# Altium PCB daughterboard.PcbDoc
Units mm, origin at the board's own origin, x right, y up, seen from the top; angles counter-clockwise.
Board outline 54 x 42 mm, 2 copper layers (Top Layer, Bottom Layer); 40 components, 33 nets, 170 pads, 19 vias.
Unrouted connection lines stored in the file: 13.
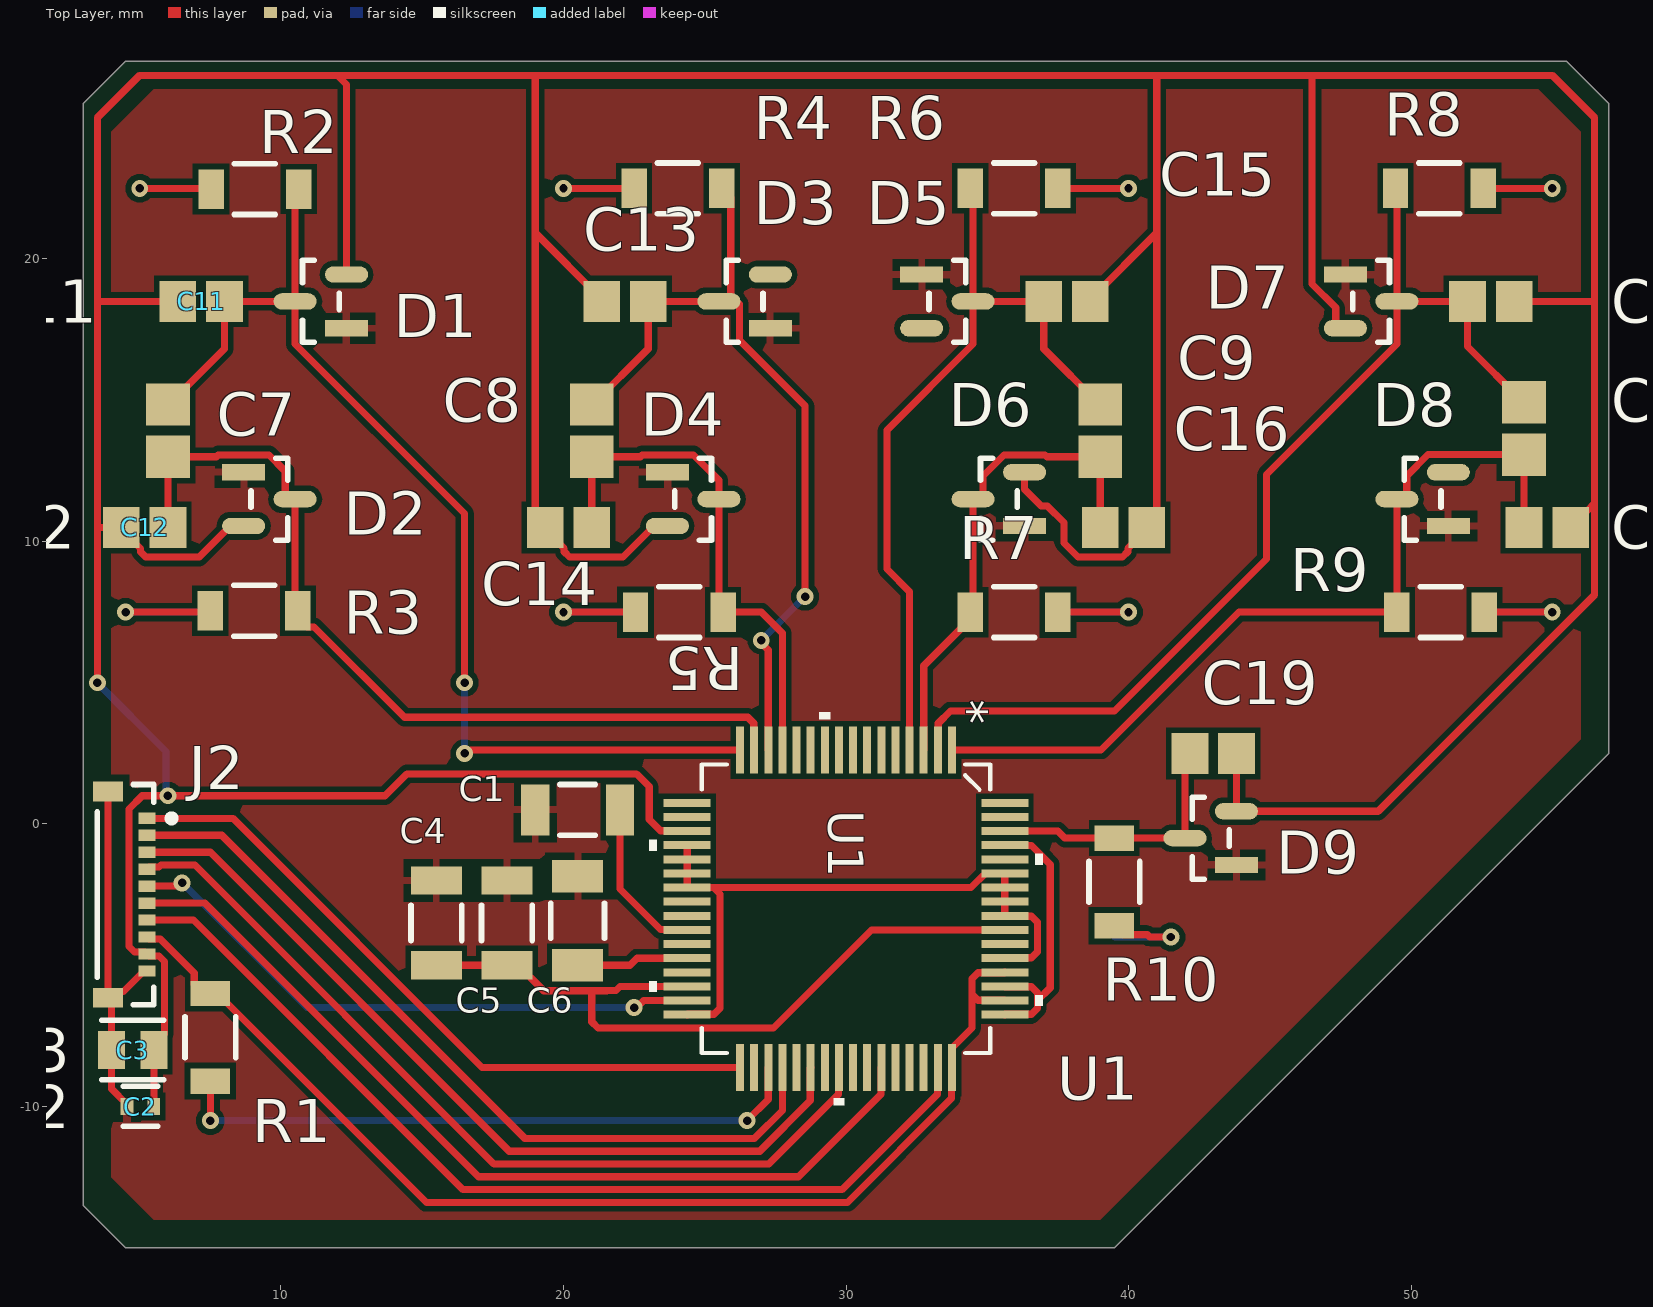
[diagram p0: Top Layer view]
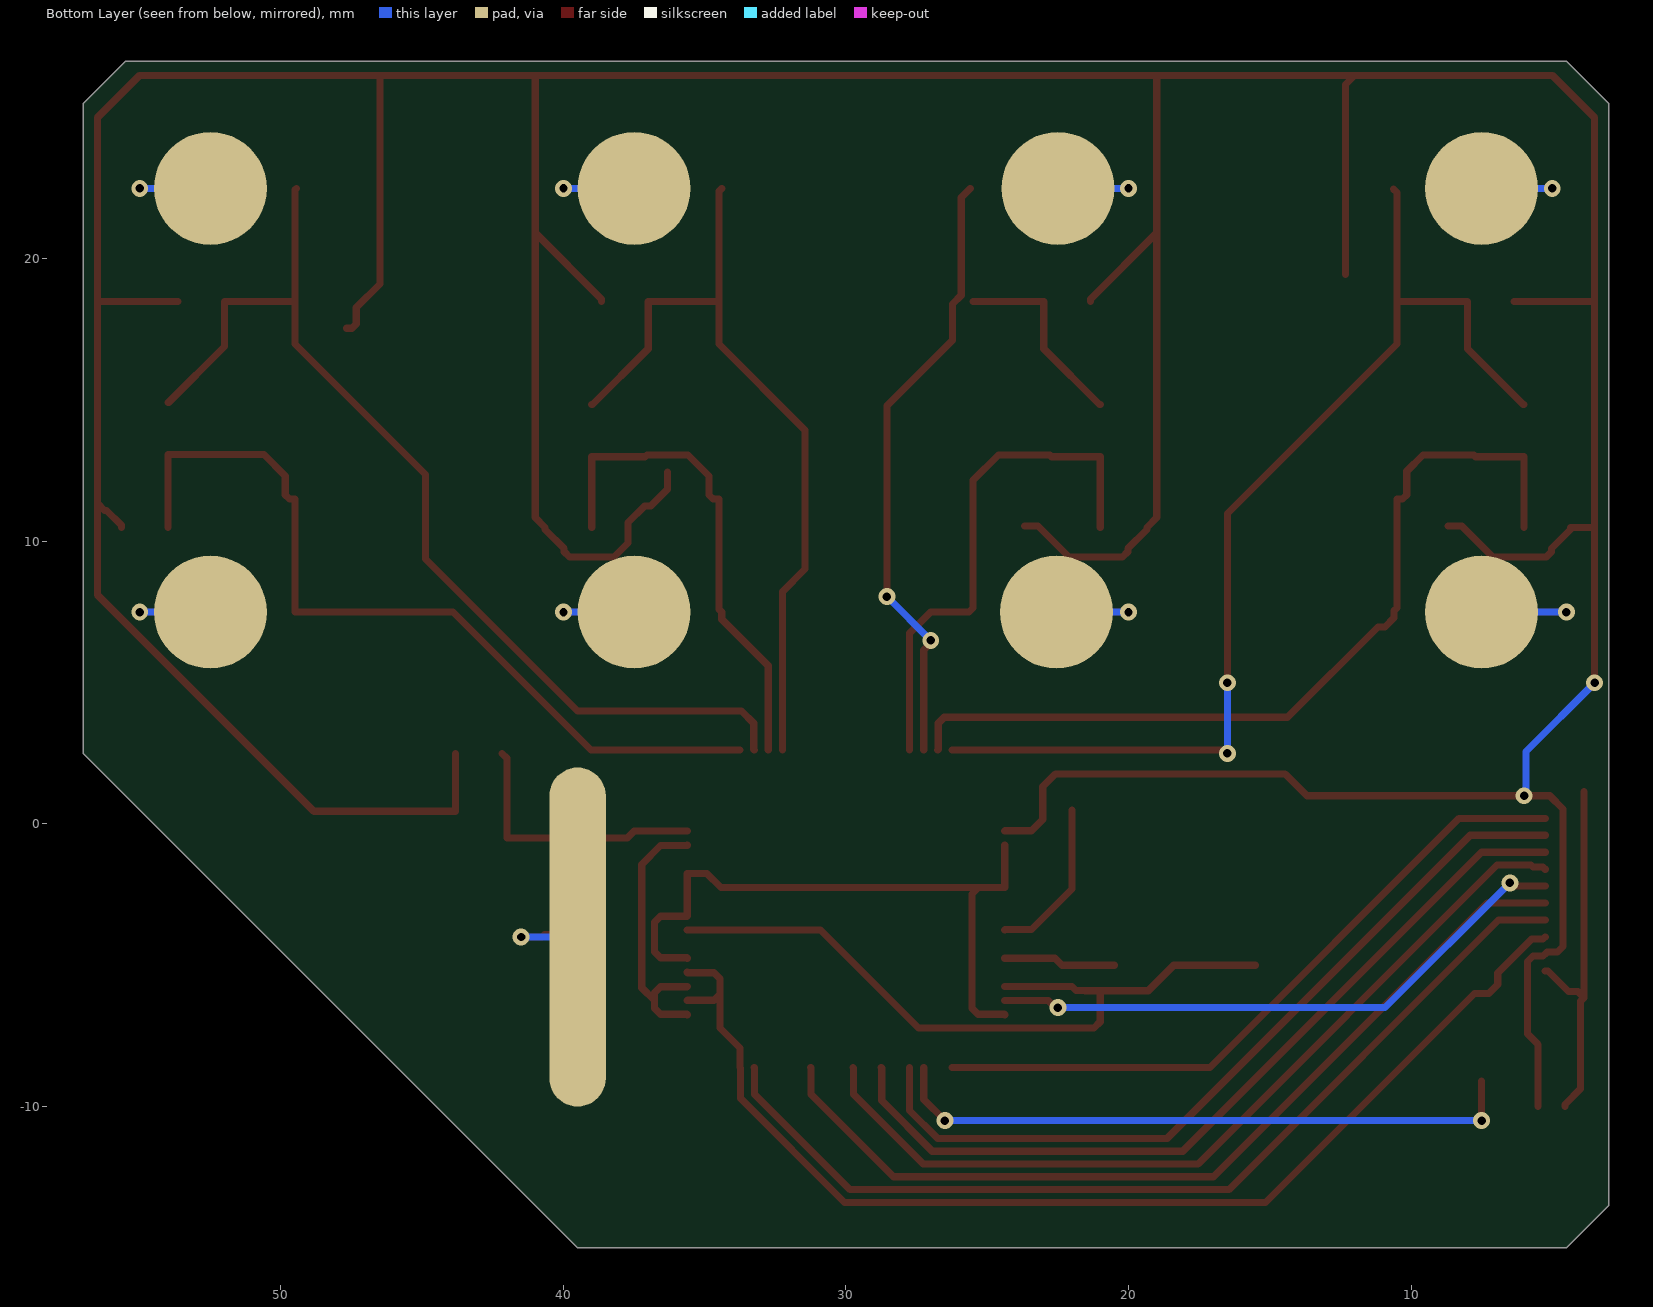
[diagram p1: Bottom Layer view, seen from below]
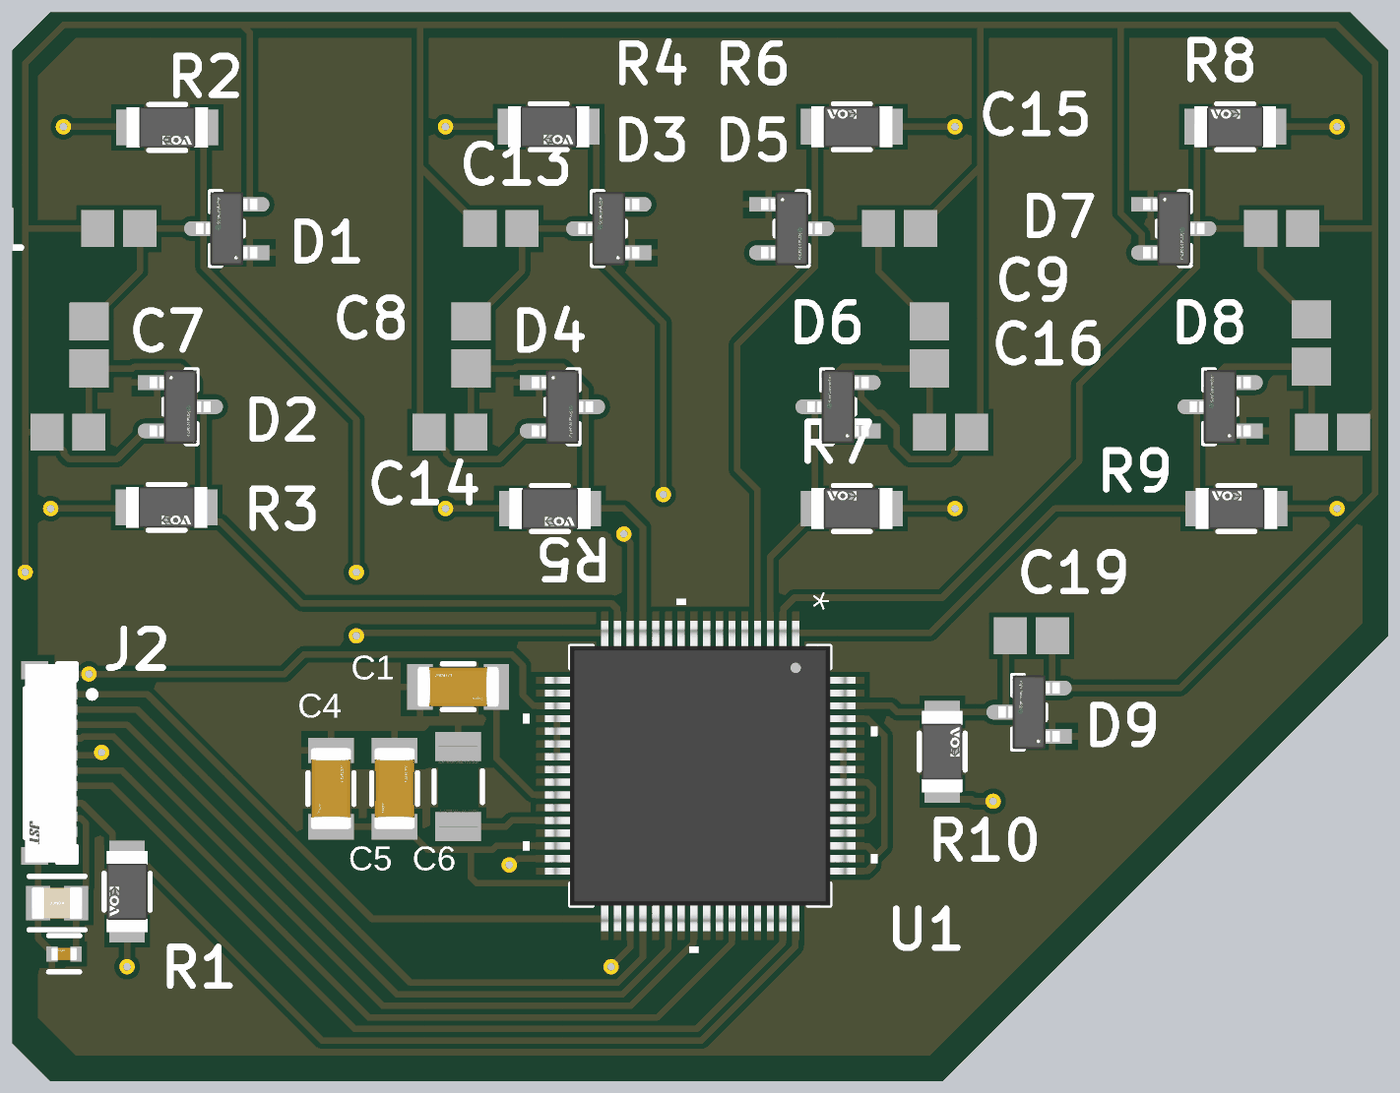
[diagram p2: 3D render of the assembled board from above, using the file's embedded part models]

## Layer stack, top to bottom
Top Solder: solder mask 0.0102, Solder Resist, Dk 3.5
Top Layer: signal copper 0.0356
Dielectric 1: dielectric 0.32, FR-4, Dk 4.8
Bottom Layer: signal copper 0.0356
Bottom Solder: solder mask 0.0102, Solder Resist, Dk 3.5

## Board outline
4.5,-15 3,-13.5 3,25.5 4.5,27 55.5,27 57,25.5 57,2.5 39.5,-15

## Design rules (kind name [scope] priority, off if disabled: settings)
Clearance [All] p1: gap=0.2 ignorepadtopadclearanceinfootprint=FALSE
PolygonConnect [All] p1: connectstyle=Relief reliefconductorwidth=0.254 reliefentries=4 polygonreliefangle="90 Angle" airgapwidth=0.254
RoutingVias [All] p1: holewidth=0.711 width=1.27 viastyle="Through Hole" minholewidth=0.711 minwidth=1.27 maxholewidth=0.711 maxwidth=1.27
SolderMaskExpansion [All] p1: expansion=0 istentingtop=FALSE
Width [All] p1: maxlimit=0.254 minlimit=0.254 preferedwidth=0.254
30 further rules are at their usual default settings.

## Classes and differential pairs
component class U_PROT: C7 C8 C9 C10 C11 C12 C13 C14 C15 C16 C17 C18 C19 D1 D2 D3 D4 D5 D6 D7 D8 D9 R2 R3 R4 R5 R6 R7 R8 R9 R10
component class daughterboard: C1 C2 C3 C4 C5 C6 J2 R1 U1

## Components (designator, comment, footprint, x,y, rotation, side; value= is the part's Value field where it differs from the comment)
C1 "1u" FP-CC1206-1_25-MFG 20.5,0.5 r180 top value="1 uF"
C2 "10 u" FP-ZRB15X-0_22-MFG 5.025,-10 r180 top
C3 "10n" FP-C0805C103K8RACAUTO-MFG 4.75,-8 r180 top
C4 "1u" FP-CC1206-1_25-MFG 15.5,-3.5 r90 top value="1 uF"
C5 "1u" FP-CC1206-1_25-MFG 18,-3.5 r90 top value="1 uF"
C6 "22u" FP-GCJ31C-0_3-MFG 20.5,-3.425 r90 top
C7 "4.7nF" CAPC2013X145X48ML20T23 6,13.925 r90 top
C8 "4.7nF" CAPC2013X145X48ML20T23 21,13.925 r90 top
C9 "4.7nF" CAPC2013X145X48ML20T23 39,13.925 r90 top
C10 "4.7nF" CAPC2013X145X48ML20T23 54,14 r90 top
C11 "470pF" CAPC2013X145X48NL20T23 7.175,18.5 r0 top
C12 "470pF" CAPC2013X145X48NL20T23 5.175,10.5 r0 top
C13 "470pF" CAPC2013X145X48NL20T23 22.175,18.5 r0 top
C14 "470pF" CAPC2013X145X48NL20T23 20.175,10.5 r0 top
C15 "470pF" CAPC2013X145X48NL20T23 37.825,18.5 r180 top
C16 "470pF" CAPC2013X145X48NL20T23 39.825,10.5 r180 top
C17 "470pF" CAPC2013X145X48NL20T23 52.825,18.5 r180 top
C18 "470pF" CAPC2013X145X48NL20T23 54.825,10.5 r180 top
C19 "470pF" CAPC2013X145X48NL20T23 43,2.5 r180 top
D1 "AV99LT1G" FP-318-08-IPC_B 11.41,18.5 r180 top
D2 "AV99LT1G" FP-318-08-IPC_B 9.59,11.5 r0 top
D3 "AV99LT1G" FP-318-08-IPC_B 26.41,18.5 r180 top
D4 "AV99LT1G" FP-318-08-IPC_B 24.59,11.5 r0 top
D5 "AV99LT1G" FP-318-08-IPC_B 33.59,18.5 r0 top
D6 "AV99LT1G" FP-318-08-IPC_B 35.41,11.5 r180 top
D7 "AV99LT1G" FP-318-08-IPC_B 48.59,18.5 r0 top
D8 "AV99LT1G" FP-318-08-IPC_B 50.41,11.5 r180 top
D9 "AV99LT1G" FP-318-08-IPC_B 42.91,-0.5 r180 top
J2 "SM10B-XSRS-ETB (LF)(SN)" FP-SM10B-XSRS-ETB_LF_SN-MFG 4.5,-2.5 r270 top
R1 "10k - RN73R2BTTD1001F25" FP-RN73R2B-MFG 7.5,-7.55 r270 top
R2 "10k" FP-RN73R2B-MFG 9.075,22.475 r0 top
R3 "10k - RN73R2BTTD1001F25" FP-RN73R2B-MFG 9.05,7.55 r0 top
R4 "10k - RN73R2BTTD1001F25" FP-RN73R2B-MFG 24.05,22.5 r0 top
R5 "10k - RN73R2BTTD1001F25" FP-RN73R2B-MFG 24.1,7.5 r0 top
R6 "10k - RN73R2BTTD1001F25" FP-RN73R2B-MFG 35.95,22.5 r180 top
R7 "10k - RN73R2BTTD1001F25" FP-RN73R2B-MFG 35.95,7.5 r180 top
R8 "10k - RN73R2BTTD1001F25" FP-RN73R2B-MFG 51,22.5 r180 top
R9 "10k - RN73R2BTTD1001F25" FP-RN73R2B-MFG 51.05,7.5 r180 top
R10 "10k - RN73R2BTTD1001F25" FP-RN73R2B-MFG 39.5,-2.05 r90 top
U1 "ADS1298IPAG" PAG64 30,-3 r270 top

## Footprints (in the part's own frame and the unit in brackets; to place one, negate y for a bottom-side part, rotate by r counter-clockwise, add the part's x,y. Pads: shape width x height; smd on the part's side, far side on the other; paste and mask are expansions set on the pad)
CAPC2013X145X48ML20T23 [mm] "Chip Capacitor, 2-Leads, Body 2.00x1.25mm, IPC Low Density"
  rect 1.5x1.55 smd: 1(-0.925,0) 2(0.925,0)
  body extent -1.1,-0.72 1.1,0.72, height 1.45
CAPC2013X145X48NL20T23 [mm] "Chip Capacitor, 2-Leads, Body 2.00x1.25mm, IPC Medium Density"
  rect 1.3x1.45 smd: 1(-0.825,0) 2(0.825,0)
  body extent -1.1,-0.72 1.1,0.72, height 1.45
FP-318-08-IPC_B [mm]
  rect 1.524x0.578 smd paste+0 mask+0: 1(-0.91,0.95)
  rrect100% 1.524x0.578 smd paste+0 mask+0: 2(-0.91,-0.95) 3(0.91,0)
  silkscreen extent -0.65,-1.45 0.65,1.45, body extent -1.92,-1.7 1.92,1.7, height 0.25
FP-C0805C103K8RACAUTO-MFG [mm]
  rect 0.95x1.35 smd paste+0 mask+0: 1(-0.75,0) 2(0.75,0)
  silkscreen extent -1.1,-1.05 1.1,1.05, body extent -1.4,-0.85 1.4,0.85, height 0.25
FP-CC1206-1_25-MFG [mm]
  rect 1x1.8 smd paste+0 mask+0: 1(-1.5,0) 2(1.5,0)
  silkscreen extent -0.63,-0.9 0.63,0.9, body extent -2.2,-1.25 2.2,1.25, height 0.25
FP-GCJ31C-0_3-MFG [mm]
  rect 1.15x1.8 smd paste+0 mask+0: 1(-1.575,0) 2(1.575,0)
  silkscreen extent -0.63,-0.95 0.63,0.95, body extent -2.25,-1.05 2.25,1.05, height 0.25
FP-RN73R2B-MFG [mm]
  rect 0.9x1.4 smd paste+0 mask+0: 1(-1.55,0) 2(1.55,0)
  silkscreen extent -0.72,-0.9 0.72,0.9, body extent -2.1,-1 2.1,1, height 0.25
FP-SM10B-XSRS-ETB_LF_SN-MFG [mm]
  rect 0.4x0.6 smd paste+0 mask+0: 1(-2.7,0.75) 2(-2.1,0.75) 3(-1.5,0.75) 4(-0.9,0.75) 5(-0.3,0.75) 6(0.3,0.75) 7(0.9,0.75) 8(1.5,0.75) 9(2.1,0.75) 10(2.7,0.75)
  rect 0.7x1.05 smd paste+0 mask+0: 11(-3.65,-0.625) 12(3.65,-0.625)
  silkscreen extent -3.9,-1 3.9,1.75, body extent -4.1,-1.25 4.1,1.15, height 0.25
FP-ZRB15X-0_22-MFG [mm]
  rect 0.45x0.6 smd paste+0 mask+0: 1(-0.475,0) 2(0.475,0)
  silkscreen extent -0.62,-0.72 0.61,0.7, body extent -0.8,-0.45 0.8,0.45, height 0.25
PAG64 [mil]
  rect 65.5x11 smd paste-32.75 mask-33: 1(-221.25,147.64) 2(-221.25,127.95) 3(-221.25,108.27) 4(-221.25,88.58) 5(-221.25,68.9) 6(-221.25,49.21) 7(-221.25,29.53) 8(-221.25,9.84) 9(-221.25,-9.84) 10(-221.25,-29.53) 11(-221.25,-49.21) 12(-221.25,-68.9) 13(-221.25,-88.58) 14(-221.25,-108.27) 15(-221.25,-127.95) 16(-221.25,-147.64) 33(221.25,-147.64) 34(221.25,-127.95) 35(221.25,-108.27) 36(221.25,-88.58) 37(221.25,-68.9) 38(221.25,-49.21) 39(221.25,-29.53) 40(221.25,-9.84) 41(221.25,9.84) 42(221.25,29.53) 43(221.25,49.21) 44(221.25,68.9) 45(221.25,88.58) 46(221.25,108.27) 47(221.25,127.95) 48(221.25,147.64)
  rect 11x65.5 smd paste-32.75 mask-33: 17(-147.64,-221.25) 18(-127.95,-221.25) 19(-108.27,-221.25) 20(-88.58,-221.25) 21(-68.9,-221.25) 22(-49.21,-221.25) 23(-29.53,-221.25) 24(-9.84,-221.25) 25(9.84,-221.25) 26(29.53,-221.25) 27(49.21,-221.25) 28(68.9,-221.25) 29(88.58,-221.25) 30(108.27,-221.25) 31(127.95,-221.25) 32(147.64,-221.25) 49(147.64,221.25) 50(127.95,221.25) 51(108.27,221.25) 52(88.58,221.25) 53(68.9,221.25) 54(49.21,221.25) 55(29.53,221.25) 56(9.84,221.25) 57(-9.84,221.25) 58(-29.53,221.25) 59(-49.21,221.25) 60(-68.9,221.25) 61(-88.58,221.25) 62(-108.27,221.25) 63(-127.95,221.25) 64(-147.64,221.25)
  silkscreen extent -274,-274 274,274, body extent -240,-240 240,240, height 47

## Part data
C1 C4 C5: library part CMP-03422-001151-1, "CC1206 1 uF X7R 10.00%16 V", Capacitance="1 uF", Manufacturer=Yageo, Manufacturer Part Number=CC1206KFX7R7BB105, Package=CC1206-1.25, Temperature="-55°C to +125°C", Temperature Characteristic=X7R, Temperature Coefficient=15%, Temperature Range High=+125°C, Temperature Range Low=-55°C, Tolerance=0.1, Voltage Rating="16 V", Automotive=No, Automotive Grade=NA, Category=Cap, ComponentLink2Description=Datasheet, ComponentLink2URL=http://www.yageo.com/documents/recent/UPY-NP0X7R_HV_1KV-to-3KV_11.pdf, Device Class L1="Passive Components", Device Class L2=Capacitors, Device Class L3="Ceramic Capacitors", Footprint Url=http://www.yageo.com/exep/pages/download/literatures/UPY-C_GEN_24.pdf, Height=1.45mm, Lead Free=Yes, Material=Ceramic, Mouser Description="Multilayer Ceramic Capacitors MLCC - SMD/SMT 1.0uF 16V X7R 10%", Octopart=https://octopart.com/cc1206kfx7r7bb105-yageo-22250947, RoHS=TRUE
C2: library part CMP-06035-063245-1, "Multilayer Ceramic Capacitors on Interposer Board for General Purpose 10μF ±20% 4VDC X6S  SMD  0402"
C3: library part CMP-00212-126448506-1, "C0805C103K8RACAUTO Cap, 0.01UF, 10V, Mlcc, 0805 Rohs Compliant: Yes", Capacitance=10nF, Case/Package=0805, Dielectric=X7R, Max Operating Temperature=125°C, Min Operating Temperature=-55°C, Tolerance=10%, Voltage Rating=10V, Height=880µm, Material=Ceramic, NexarPartId=126448506, RoHS=Compliant, Voltage Rating (DC)=10V
C6: library part CMP-06035-003359-1, "Cap Ceramic 22uF 10V X7R 20% Pad SMD 1206 Soft Termination  +125°C Automotive T/R"
C7 C8 C9 C10: library part CMP-2007-01915-1, Manufacturer=Vitramon, Part Number=VJ0805Y472KXBMC
C11 C12 C13 C14 C15 C16 C17 C18 C19: library part CMP-2007-03106-1, Manufacturer=Vitramon, Part Number=VJ0805A471JXBMC
D1 D2 D3 D4 D5 D6 D7 D8 D9: library part CMP-07163-000036-1, "DIODE ARRAY 100V 215MA SOT23-3", Capacitance=1.5pF, Case/Package=SOT-23, Current Rating=200mA, Forward Current=150mA, Forward Voltage=1.25V, Max Forward Surge Current (Ifsm)=500mA, Max Operating Temperature=150°C, Max Repetitive Reverse Voltage (Vrrm)=70V, Min Operating Temperature=-65°C, Peak Non-Repetitive Surge Current=2A, Peak Reverse Current=2.5uA, Height=0.94mm, Lead Free="Lead Free", Length=2.9mm, Mount="Surface Mount", Number of Pins=3, Packaging="Tape and Reel", REACH SVHC="No SVHC", Reverse Recovery Time=6ns, Voltage Rating (DC)=70V, Width=1.3mm
J2: library part CMP-17439-000651-1, "CONN HEADER SMD R/A 10POS 0.6MM", Current Rating=200mA, Flammability Rating="UL94 V-0", Insulation Color=Natural, Max Operating Temperature=85°C, Min Operating Temperature=-25°C, Voltage Rating=30V, Connector Type=Header, Contact Finish - Mating=TIN, Contact Material="Copper Alloy", Contact Shape=Rectangular, Contact Type="Outer Shroud Contact", Fastening Type=Friction, Insulation Material=Nylon, Mount="Surface Mount", Number of Contacts=10, Number of Rows=1, Orientation=Straight, Packaging="Cut Tape", Pitch=0.6mm, Series=XSR, Termination=Solder
R1 R2 R3 R4 R5 R6 R7 R8 R9 R10: library part CMP-04015-029161-1, "1kΩ ±1% 0.25W, 1/4W Chip Resistor 1206 (3216 Metric) Moisture Resistant Thin Film"
U1: "8-Channel 24-bit ADC With Integrated ECG Front End 64-TQFP -40 to 85", Manufacturer_Name="Texas Instruments", Copyright="Copyright (C) 2026 Ultra Librarian. All rights reserved.", Manufacturer_Part_Number=ADS1298IPAG, RefDes=RefDes, Type=Type

## Free pads (board coordinates)
  oval 2x12 smd far side: 2(39.5,-4)
  round 4 smd far side: ""(7.5,7.5) ""(7.5,22.5) ""(22.5,22.5) ""(22.55,7.5) ""(37.5,22.5) ""(37.5,7.5) ""(52.5,7.5) ""(52.5,22.5)

## Via types
v1: diameter 0.6, hole 0.3, Top Layer to Bottom Layer, 19 vias

## Nets (pads, with @x,y where several pads share a name; then routed paths per layer and width w, separated by ;. In a path a pad name is that pad's centre, name@x,y a point inside that pad or via, vN(x,y) a via of type N, cw(c..) or ccw(c..) an arc to the next point about the centre after c; other vN are vias at no path point)
CH1_N: pad.@7.5,7.5 R3.1 | length 6
  Top Layer w0.254: v1(4.5,7.5) 7.45,7.5 R3.1
  Bottom Layer w0.254: v1(4.5,7.5) pad.@7.5,7.5
CH1_P: pad.@7.5,22.5 R2.1 | length 5
  Top Layer w0.254: v1(5,22.5) 7.5,22.5 R2.1
  Bottom Layer w0.254: v1(5,22.5) pad.@7.5,22.5
CH2_N: pad.@22.55,7.5 R5.1 | length 5.1
  Top Layer w0.254: v1(20,7.5) R5.1
  Bottom Layer w0.254: v1(20,7.5) pad.@22.55,7.5
CH2_P: pad.@22.5,22.5 R4.1 | length 5
  Top Layer w0.254: v1(20,22.5) R4.1
  Bottom Layer w0.254: v1(20,22.5) pad.@22.5,22.5
CH3_N: pad.@37.5,7.5 R7.1 | length 5
  Top Layer w0.254: R7.1 v1(40,7.5)
  Bottom Layer w0.254: pad.@37.5,7.5 v1(40,7.5)
CH3_P: pad.@37.5,22.5 R6.1 | length 5
  Top Layer w0.254: R6.1 v1(40,22.5)
  Bottom Layer w0.254: pad.@37.5,22.5 v1(40,22.5)
CH4_N: pad.@52.5,7.5 R9.1 | length 4.9
  Top Layer w0.254: R9.1 v1(55,7.5)
  Bottom Layer w0.254: pad.@52.5,7.5 v1(55,7.5)
CH4_P: pad.@52.5,22.5 R8.1 | length 5
  Top Layer w0.254: R8.1 v1(55,22.5)
  Bottom Layer w0.254: pad.@52.5,22.5 v1(55,22.5)
DB_AGND: C1.2 C2.2 C3.2 C4.2 C5.2 C6.2 D1.1 D2.1 D3.1 D4.1 D5.1 D6.1 D7.1 D8.1 D9.1 J2.10 J2.11 J2.12 | length 13.2
  Top Layer w0.254: J2.11 J2.12 ; C2.2 4.55,-9.925 4,-9.375 C3.2 4,-6.275 J2.12 ; J2.10 5.15,-5.2 4.423,-5.927 4.098,-5.927 J2.12
DB_AVDD: C2.1 C3.1 C11.1 C12.1 C13.1 C14.1 C15.1 C16.1 C17.1 C18.1 C19.1 D1.2 D2.2 D3.2 D4.2 D5.2 D6.2 D7.2 D8.2 D9.2 J2.9 U1.19 U1.20 U1.21 U1.22 U1.23 U1.32 U1.53 U1.56 U1.57 U1.58 U1.59 | length 252.3
  Top Layer w0.254: v1(3.5,5) 3.5,10.5 ; C2.1 C3.1 5.5,-7.8 5.877,-7.423 5.877,-4.865 5.685,-4.673 5.323,-4.673 J2.9 5.177,-4.527 4.815,-4.527 4.623,-4.335 4.623,0.535 5.088,1 13.682,1 14.455,1.773 22.589,1.773 23.035,1.328 23.035,0.162 23.434,-0.237 24.368,-0.237 U1.19 ; C11.1 3.5,18.5 ; D2.2 8.206,10.55 7.104,9.448 5.215,9.448 5.023,9.64 5.023,9.752 4.35,10.425 C12.1 3.5,10.5 ; D1.2 12.32,26.18 12,26.5 ; C13.1 21.35,18.575 19,20.925 ; D4.2 23.206,10.55 22.104,9.448 20.215,9.448 20.023,9.64 20.023,9.752 19.35,10.425 C14.1 19,10.85 19,20.925 ; U1.32 24.393,-6.737 25.327,-6.737 25.539,-6.525 25.539,-2.475 25.327,-2.263 ; U1.20 U1.21 U1.22 U1.23 34.428,-2.25 34.928,-1.75 U1.59 U1.58 U1.57 U1.56 35.632,-3.263 36.566,-3.263 36.779,-3.475 36.779,-4.525 36.566,-4.737 35.632,-4.737 U1.53 ; D6.2 36.32,11.846 36.909,11.257 37.127,11.257 37.716,10.668 37.716,9.946 38.215,9.448 39.785,9.448 39.977,9.64 39.977,9.752 40.65,10.425 C16.1 41,10.85 41,20.925 ; C15.1 38.65,18.575 41,20.925 ; C19.1 43.82,2.495 D9.2 48.837,0.45 56.5,8.113 56.5,11.35 ; D7.2 47.483,17.55 47.333,17.7 47.333,18.283 46.5,19.116 46.5,26.5 ; C17.1 56.5,18.5 ; C18.1 55.65,10.575 56.173,11.098 56.248,11.098 56.5,11.35 ; 3.5,10.5 3.5,18.5 ; 3.5,18.5 3.5,25 5,26.5 12,26.5 ; 12,26.5 19,26.5 ; 19,20.925 19,26.5 ; 19,26.5 41,26.5 ; 41,20.925 41,26.5 ; 41,26.5 46.5,26.5 ; 46.5,26.5 55,26.5 56.5,25 56.5,18.5 ; 56.5,11.35 56.5,18.5
  Bottom Layer w0.254: v1(3.5,5) 5.934,2.566 5.934,1.066 v1(6,1)
DB_DGND: J2.1 U1.33 U1.41 U1.46 U1.49 U1.51 U1.61 | length 34.6
  Top Layer w0.254: J2.1 8.3,0.2 17.12,-8.62 U1.33 ; U1.49 35.632,-6.737 36.566,-6.737 36.779,-6.525 36.779,-6.25 ; U1.51 35.632,-5.763 36.566,-5.763 36.779,-5.975 36.779,-6.25 ; U1.61 35.632,-0.763 36.566,-0.763 37.233,-1.429 37.233,-5.796 36.779,-6.25
DB_DVDD: J2.8 R1.1 U1.48 U1.50 U1.52 | length 41.2
  Top Layer w0.254: J2.8 5.323,-4.073 5.727,-4.073 6.927,-5.273 6.927,-5.677 7.25,-6 R1.1 7.75,-6 15.147,-13.397 30.049,-13.397 33.737,-9.708 33.737,-8.632 U1.48 33.75,-7.928 34.461,-7.217 34.461,-6.025 ; U1.50 35.607,-6.237 34.673,-6.237 34.461,-6.025 ; U1.52 35.607,-5.263 34.673,-5.263 34.461,-5.475 34.461,-6.025
DB_START_AFE: J2.3 U1.38 | length 29.8
  Top Layer w0.254: J2.3 7.5,-1 18.081,-11.581 26.948,-11.581 28.737,-9.791 28.737,-8.632 U1.38
DB_~CS_AFE: U1.39
DB_~DRDY_AFE: J2.7 U1.47 | length 34.3
  Top Layer w0.254: J2.7 6.9,-3.4 16.443,-12.943 29.861,-12.943 33.237,-9.566 33.237,-8.632 U1.47
DB_~RESET_AFE: J2.2 U1.36 | length 28.9
  Top Layer w0.254: J2.2 7.9,-0.4 18.627,-11.127 26.76,-11.127 27.75,-10.137 U1.36
DRL: pad.2 R10.1 | length 4.2
  Top Layer w0.254: R10.1 39.823,-3.923 40.668,-3.923 40.745,-4 v1(41.5,-4)
  Bottom Layer w0.254: pad.2 v1(41.5,-4)
IN1N: C7.1 C12.2 D2.3 R3.2 U1.15 | length 31
  Top Layer w0.254: C12.2 C7.1 7.716,13 7.782,13.066 9.577,13.066 10.154,12.489 10.154,11.65 10.304,11.5 D2.3 10.5,7.65 R3.2 10.6,7.3 10.923,6.977 11.173,6.977 14.371,3.779 26.525,3.779 26.737,3.566 26.737,2.632 U1.15
IN1P: C7.2 C11.2 D1.3 R2.2 U1.16 | length 39.3
  Top Layer w0.254: C7.2 6.025,14.85 8,16.825 C11.2 D1.3 ; R2.2 10.5,22.35 D1.3 ; v1(16.5,2.5) 16.594,2.5 16.713,2.62 U1.16 ; v1(16.5,5) 16.5,10.987 10.5,16.987 D1.3
  Bottom Layer w0.254: v1(16.5,2.5) v1(16.5,5)
IN2N: C8.1 C14.2 D4.3 R5.2 U1.13 | length 18.7
  Top Layer w0.254: C14.2 C8.1 22.716,13 22.782,13.066 24.604,13.066 25.5,12.17 D4.3 25.5,7.65 R5.2 27,7.5 27.75,6.75 U1.13
IN2P: C8.2 C13.2 D3.3 R4.2 U1.14 | length 28.8
  Top Layer w0.254: C8.2 21.025,14.85 23,16.825 C13.2 D3.3 ; R4.2 25.923,22.177 25.923,18.719 26.231,18.411 26.231,17.126 28.552,14.805 v1(28.552,8.052) ; v1(27,6.5) 27,6.406 27.25,6.156 U1.14
  Bottom Layer w0.254: v1(27,6.5) v1(28.552,8.052)
IN3N: C9.1 C16.2 D6.3 R7.2 U1.3 | length 17.7
  Top Layer w0.254: U1.3 32.75,5.6 34.4,7.25 R7.2 34.5,7.6 D6.3 34.696,11.5 34.846,11.65 34.846,12.32 35.592,13.066 37.049,13.066 37.115,13 C9.1 C16.2
IN3P: C9.2 C15.2 D5.3 R6.2 U1.4 | length 28.5
  Top Layer w0.254: U1.4 32.25,8.223 31.448,9.025 31.448,13.935 34.5,16.987 D5.3 ; R6.2 34.5,22.4 D5.3 ; C9.2 38.975,14.85 37,16.825 C15.2 D5.3
IN4N: C10.1 C18.2 D8.3 R9.2 U1.1 | length 29.9
  Top Layer w0.254: U1.1 39.03,2.62 43.91,7.5 R9.2 D8.3 49.696,11.5 49.846,11.65 49.846,12.32 50.601,13.075 C10.1 C18.2
IN4P: C10.2 C17.2 D7.3 R8.2 U1.2 | length 36.9
  Top Layer w0.254: U1.2 33.263,2.632 33.263,3.566 33.696,4 39.5,4 44.88,9.38 44.88,12.367 49.5,16.987 D7.3 ; R8.2 49.5,22.45 D7.3 ; C10.2 53.975,14.925 52,16.9 C17.2 D7.3
MISO: J2.6 U1.43 | length 32.2
  Top Layer w0.254: J2.6 7.3,-2.8 16.989,-12.489 28.315,-12.489 31.237,-9.566 31.237,-8.632 U1.43
MOSI: J2.5 U1.31 | length 21.1
  Top Layer w0.254: J2.5 6.287,-2.2 6.406,-2.081 v1(6.5,-2.081) ; v1(22.5,-6.5) 22.594,-6.5 22.844,-6.25 U1.31
  Bottom Layer w0.254: v1(6.5,-2.081) 10.919,-6.5 v1(22.5,-6.5)
NetC1_1: C1.1 U1.26 | length 5.8
  Top Layer w0.254: C1.1 22,-2.304 23.434,-3.737 24.368,-3.737 U1.26
NetC4_1: C4.1 C5.1 U1.30 U1.55 | length 26.6
  Top Layer w0.254: C4.1 18.4,-5 19.302,-5.902 21,-5.902 ; U1.30 22,-5.75 21.854,-5.896 21.541,-5.896 21.535,-5.902 21,-5.902 ; U1.55 30.904,-3.75 27.437,-7.217 21.217,-7.217 21,-7 21,-5.902
NetC6_1: C6.1 U1.28 | length 4
  Top Layer w0.254: C6.1 22.356,-5 22.606,-4.75 U1.28
NetR1_2: R1.2 U1.35 | length 22.6
  Top Layer w0.254: v1(7.5,-10.5) R1.2 ; v1(26.5,-10.5) 27.25,-9.75 U1.35
  Bottom Layer w0.254: v1(7.5,-10.5) v1(26.5,-10.5)
RLDIN: C19.2 D9.3 R10.2 U1.62 | length 9.6
  Top Layer w0.254: U1.62 37.494,-0.25 37.744,-0.5 R10.2 D9.3 42,2.325 C19.2
SCK: J2.4 U1.40 | length 30.9
  Top Layer w0.254: J2.4 5.323,-1.527 5.685,-1.527 5.758,-1.454 6.954,-1.454 17.535,-12.035 27.269,-12.035 29.737,-9.566 29.737,-8.632 U1.40
pads on no net: U1.5 U1.6 U1.7 U1.8 U1.9 U1.10 U1.11 U1.12 U1.17 U1.18 U1.24 U1.25 U1.27 U1.29 U1.34 U1.37 U1.42 U1.44 U1.45 U1.54 U1.60 U1.63 U1.64

## Polygon pours and split planes (outlines as drawn)
DB_AGND on Top Layer "DB_AGND_L01_P001" (solid, remove dead copper, pour order 1): 4,-12.5 5.5,-14 39,-14 56,3 56,24.5 54.5,26 5.5,26 4,24.5

## Text inside footprints (layer, text, board x,y; h text height)
U1: Top 3D Body "*" at 33.746,4.404 h1.27 r270; Top Overlay "*" at 33.746,4.404 h1.27 r270